# EAGLE board tricolor_rev1 (EAGLE 5.04)
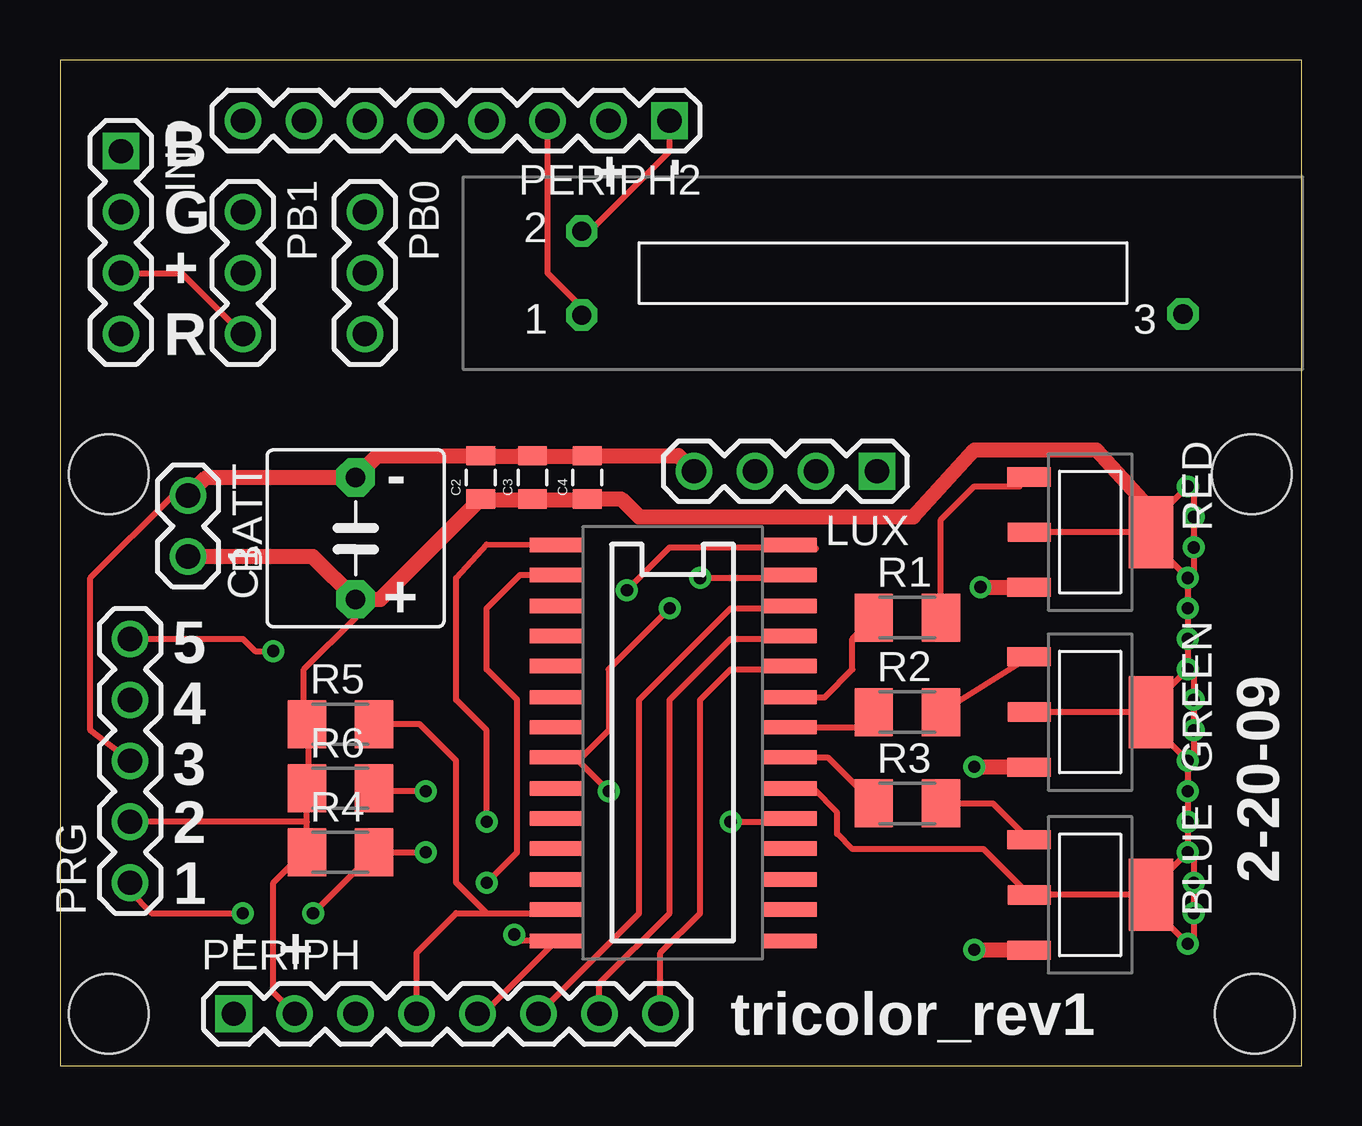
[diagram p0: board, top side]
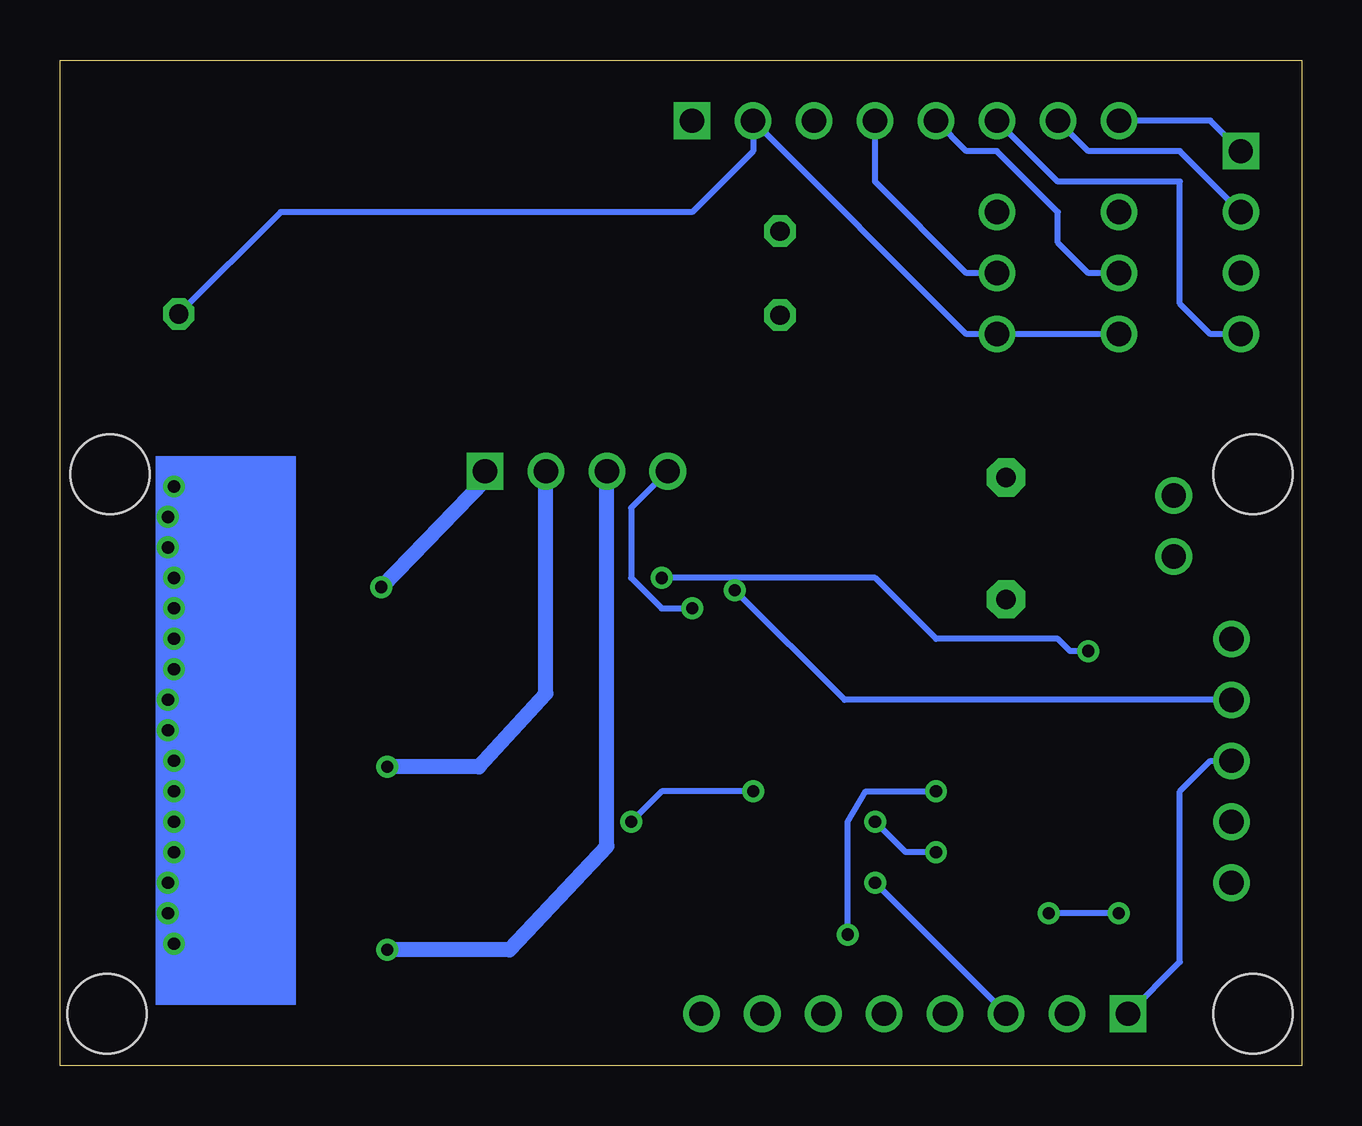
[diagram p1: board, bottom side, seen from below]

Size 51.74 x 41.9 mm. Coordinates in mm from the lower left corner, seen from the top.
Outline: 0,0 51.74,0 51.74,41.9 0,41.9 0,0
Copper layers (1*16): Top 0.035mm / dielectric 1.5mm / Bottom 0.035mm
Design rules "default": minimum track width 10mil, minimum drill 24mil, track to track 8mil, track to pad 8mil, pad to pad 8mil, via to via 8mil, smd to smd 8mil, copper to edge 40mil, drill to drill 8mil, minimum pad ring 10mil, minimum via ring 8mil, stop-mask expansion 4mil, vias tented up to drill 0mil, thermal gap 10mil

## Footprints (pad centres in the part's own frame; a part is rotated, then mirrored left to right if it is on the bottom)
SLIDER-CUSTOM = drill 0.8 octagon: P$1 -12.5,1.7; P$2 12.55,1.75; P$3 12.55,-1.75
1X02 = drill 1.016 round: 1 0,0; 2 2.54,0
SOT223 = smd 0.8 x 1.8: BASE -2.3,-2.55; COLL 0,-2.54; EMIT 2.3,-2.55 | smd 3 x 1.85: HEAT 0,2.54
C5B7.2 = drill 0.813 pad 1.6 octagon: 1 -2.54,0; 2 2.54,0
0805 = smd 0.8 x 1.2: 1 -0.9,0; 2 0.9,0
1X04 = drill 1.016 square: 1 0,0 | drill 1.016 round: 2 2.54,0; 3 5.08,0; 4 7.62,0
SOIC-28 = smd 0.6 x 2.2: 1 -7.6,-4.85; 2 -6.35,-4.85; 3 -5.05,-4.85; 4 -3.8,-4.85; 5 -2.55,-4.85; 6 -1.25,-4.85; 7 0,-4.85; 8 1.25,-4.85; 9 2.55,-4.85; 10 3.8,-4.85; 11 5.05,-4.85; 12 6.35,-4.85; 13 7.6,-4.85; 14 8.9,-4.85; 15 8.9,4.9; 16 7.6,4.9; 17 6.35,4.9; 18 5.05,4.9; 19 3.8,4.9; 20 2.55,4.9; 21 1.25,4.9; 22 0,4.9; 23 -1.25,4.9; 24 -2.55,4.9; 25 -3.8,4.9; 26 -5.05,4.9; 27 -6.35,4.9; 28 -7.6,4.9
1X03 = drill 1.016 round: 1 0,0; 2 2.54,0; 3 5.08,0
1X08 = drill 1.016 square: 1 0,0 | drill 1.016 round: 2 2.54,0; 3 5.08,0; 4 7.62,0; 5 10.16,0; 6 12.7,0; 7 15.24,0; 8 17.78,0
1X05 = drill 1.016 round: 1 0,0; 2 2.54,0; 3 5.08,0; 4 7.62,0; 5 10.16,0
M1206 = smd 1.6 x 2: 1 -1.4,0; 2 1.4,0
STAND-OFF = hole 3.302: 0,0

## Placement (x,y rotation side)
ADJUST  SLIDERV0  [SLIDER-CUSTOM]  34.29,33.02 180 top
BATT  [1X02]  5.33,23.75 270 top
BLUE  FZTA14V1  [SOT223]  42.93,7.11 270 top
C1  100uf  [C5B7.2]  12.32,21.97 90 top
C2  .01uF  [0805]  17.53,24.51 90 top
C3  .1uF  [0805]  19.68,24.51 90 top
C4  .1uF  [0805]  21.97,24.51 90 top
GREEN  FZTA14V1  [SOT223]  42.93,14.73 270 top
IND  [1X04]  2.54,38.1 270 top
LUX  [1X04]  34.04,24.77 180 top
MCU  P18F2221V1  [SOIC-28]  25.53,14.1 270 top
PB0  [1X03]  12.7,35.56 270 top
PB1  [1X03]  7.62,35.56 270 top
PERIPH  [1X08]  7.24,2.16 0 top
PERIPH2  [1X08]  25.4,39.37 180 top
PRG  [1X05]  2.92,7.62 90 top
R1  6.65K  [M1206]  35.31,18.67 0 top
R2  3.3K  [M1206]  35.31,14.73 0 top
R3  3.3K  [M1206]  35.31,10.92 0 top
R4  10K  [M1206]  11.68,8.89 0 top
R5  10K  [M1206]  11.68,14.22 0 top
R6  10K  [M1206]  11.68,11.56 0 top
RED  FZTA14V1  [SOT223]  42.93,22.23 270 top
U$1  [STAND-OFF]  2.03,2.16 0 top
U$2  [STAND-OFF]  2.03,24.64 0 top
U$3  [STAND-OFF]  49.66,24.64 0 top
U$4  [STAND-OFF]  49.78,2.16 0 top

## Library data of the parts
ADJUST BLUE GREEN MCU RED = purduecer
BATT C2-C4 IND LUX PB0 PB1 PERIPH PERIPH2 PRG U$1-U$4 = SparkFun
C1 = capacitor-wima
R1-R6 = resistor

## Nets
BLUE: IND.1 PERIPH2.8
BLUE_IND: MCU.24 PERIPH.8
BLUE_LUX: BLUE.EMIT LUX.3
GND: BATT.1 C1.2 C2.2 C3.2 C4.2 LUX.4 MCU.8 MCU.19 PERIPH.1 PRG.3
GREEN: IND.2 PERIPH2.7
GREEN_IND: MCU.25 PERIPH.7
GREEN_LUX: GREEN.EMIT LUX.2
MCLR: MCU.1 PRG.1 R4.2
N$4: MCU.23 R1.1
N$5: R1.2 RED.BASE
N$6: MCU.22 R2.1
N$7: GREEN.BASE R2.2
N$8: MCU.21 R3.1
N$9: BLUE.BASE R3.2
PB0: MCU.13 PERIPH.4 R5.2
PB1: MCU.14 PERIPH.5 R6.2
PB_0: PB0.2 PERIPH2.4
PB_1: PB1.2 PERIPH2.5
PGC: MCU.27 PRG.5
PGD: MCU.28 PRG.4
POT: MCU.2 PERIPH.3
PWR: ADJUST.P$1 IND.3 PB0.3 PB1.3 PERIPH2.2
RED: IND.4 PERIPH2.6
RED_IND: MCU.26 PERIPH.6
RED_LUX: LUX.1 RED.EMIT
SLIDE: ADJUST.P$2 PERIPH2.3
VCC: BATT.2 BLUE.COLL BLUE.HEAT C1.1 C2.1 C3.1 C4.1 GREEN.COLL GREEN.HEAT MCU.20 PERIPH.2 PRG.2 R4.1 R5.1 R6.1 RED.COLL RED.HEAT
VSS: ADJUST.P$3 PERIPH2.1

## Tracks (layer width: path | path; a pad name or v marks a point on that pad's centre or on a via)
BLUE
  Bottom 0.254: IND.1 3.81,39.37 PERIPH2.8
BLUE_IND
  Top 0.254: PERIPH.8 25.02,4.7 26.67,6.35 26.67,15.24 27.94,16.51 30.29,16.51 MCU.24
BLUE_LUX  (via drill 0.51)
  Top 0.254: 40.23,4.83 BLUE.EMIT
  Top 0.635: v38.1,4.83 40.23,4.83
  Bottom 0.635: LUX.3 28.96,9.14 33.02,4.83 v38.1,4.83
GND  (via drill 0.51)
  Top 0.254: C2.2 18.09,25.4 | 19.1,25.4 C3.2 20.12,25.4 | 21.54,25.4 C4.2 | BATT.1 4.7,23.75 1.27,20.32 1.27,13.97 PRG.3 | 21.44,12.85 MCU.8 | 21.44,12.85 v22.86,11.43 | v27.94,10.16 30.29,10.16 MCU.19 | 21.44,12.85 21.74,12.85 22.86,13.97 22.86,16.51 v25.4,19.05
  Top 0.635: 18.09,25.4 19.1,25.4 | 20.12,25.4 21.54,25.4 | C2.2 13.22,25.41 C1.2 6.1,24.51 BATT.1 | C4.2 25.77,25.41 LUX.4
  Bottom 0.254: PRG.3 3.81,12.7 5.08,11.43 5.08,4.32 PERIPH.1 | v22.86,11.43 26.67,11.43 v27.94,10.16 | v25.4,19.05 26.67,19.05 27.94,20.32 27.94,23.24 LUX.4
GREEN
  Bottom 0.254: IND.2 5.08,38.1 8.89,38.1 PERIPH2.7
GREEN_IND
  Top 0.254: PERIPH.7 22.48,3.43 25.4,6.35 25.4,15.24 27.94,17.78 30.31,17.78 MCU.25
GREEN_LUX  (via drill 0.51)
  Top 0.254: 40.23,12.45 GREEN.EMIT
  Top 0.635: v38.1,12.45 40.23,12.45
  Bottom 0.635: LUX.2 31.5,15.49 34.29,12.45 v38.1,12.45
MCLR  (via drill 0.51)
  Top 0.254: PRG.1 2.92,7.24 3.81,6.35 v7.62,6.35 | v10.54,6.35 R4.2 v15.24,8.89 | 20.57,21.59 MCU.1 17.78,21.72 16.51,20.32 16.51,15.24 17.78,13.97 v17.78,10.16
  Bottom 0.254: v7.62,6.35 v10.54,6.35 | v15.24,8.89 16.51,8.89 v17.78,10.16
N$4
  Top 0.254: MCU.23 31.86,15.35 33.02,16.51 33.02,17.78 R1.1
N$5
  Top 0.254: R1.2 36.71,22.74 38.1,24.13 39.98,24.13 RED.BASE
N$6
  Top 0.254: MCU.22 33.27,14.1 R2.1
N$7
  Top 0.254: R2.2 GREEN.BASE
N$8
  Top 0.254: MCU.21 31.98,12.85 R3.1
N$9
  Top 0.254: R3.2 38.87,10.92 BLUE.BASE
N$17  (via drill 0.51)
  other vias: 46.99,5.08
N$18  (via drill 0.51)
  other vias: 47.24,6.35
N$19  (via drill 0.51)
  other vias: 47.24,7.62
N$20  (via drill 0.51)
  other vias: 46.99,8.89
N$21  (via drill 0.51)
  other vias: 46.99,10.16
N$22  (via drill 0.51)
  other vias: 46.99,11.43
N$23  (via drill 0.51)
  other vias: 46.99,12.7
N$24  (via drill 0.51)
  other vias: 47.24,13.97
N$25  (via drill 0.51)
  other vias: 47.24,15.24
N$26  (via drill 0.51)
  other vias: 46.99,16.51
N$27  (via drill 0.51)
  other vias: 46.99,17.78
N$28  (via drill 0.51)
  other vias: 46.99,19.05
N$29  (via drill 0.51)
  other vias: 46.99,20.32
N$30  (via drill 0.51)
  other vias: 47.24,21.59
N$31  (via drill 0.51)
  other vias: 47.24,22.86
N$32  (via drill 0.51)
  other vias: 46.99,24.13
PB0
  Top 0.254: 17.78,6.35 16.51,6.35 14.86,4.7 PERIPH.4 | 17.78,6.35 20.53,6.35 MCU.13 | R5.2 14.99,14.22 16.51,12.7 16.51,7.62 17.78,6.35
PB1  (via drill 0.51)
  Top 0.254: PERIPH.5 17.64,2.16 MCU.14 19.17,5.2 v18.92,5.46 | v15.24,11.43 13.21,11.43 R6.2
  Bottom 0.254: v18.92,5.46 18.92,10.16 18.16,11.43 v15.24,11.43
PB_0
  Bottom 0.254: PB0.2 13.97,33.02 17.78,36.83 PERIPH2.4
PB_1
  Bottom 0.254: PB1.2 8.89,33.02 10.16,34.29 10.16,35.56 12.7,38.1 13.97,38.1 PERIPH2.5
PGC  (via drill 0.51)
  Top 0.254: PRG.5 7.62,17.78 8.13,17.27 v8.89,17.27 | v26.67,20.32 30.3,20.32 MCU.27
  Bottom 0.254: v8.89,17.27 9.65,17.27 10.16,17.78 15.24,17.78 17.78,20.32 v26.67,20.32
PGD  (via drill 0.51)
  Top 0.254: 31.5,21.54 MCU.28 30.32,21.59 25.4,21.59 v23.62,19.81
  Bottom 0.254: PRG.4 19.05,15.24 v23.62,19.81
POT  (via drill 0.51)
  Top 0.254: v17.78,7.62 19.05,8.89 19.05,15.24 17.78,16.51 17.78,19.05 19.18,20.45 MCU.2 20.55,20.32
  Bottom 0.254: PERIPH.3 v17.78,7.62
PWR
  Top 0.254: IND.3 5.08,33.02 PB1.3
  Bottom 0.254: PB1.3 PB0.3 13.97,30.48 PERIPH2.2 22.86,38.1 25.4,35.56 42.55,35.56 ADJUST.P$1
RED
  Bottom 0.254: IND.4 3.81,30.48 5.08,31.75 5.08,36.83 10.16,36.83 PERIPH2.6
RED_IND
  Top 0.254: PERIPH.6 24.13,6.35 24.13,15.24 27.94,19.05 30.33,19.05 MCU.26
RED_LUX  (via drill 0.51)
  Top 0.254: 40.23,19.94 RED.EMIT
  Top 0.635: v38.35,19.94 40.23,19.94
  Bottom 0.635: LUX.1 34.04,24.38 v38.35,19.94
SLIDE
  Top 0.254: ADJUST.P$2 21.74,31.6 20.32,33.02 PERIPH2.3
VCC
  Top 0.254: C2.1 18.09,23.57 | 19.1,23.57 C3.1 20.12,23.57 | 21.54,23.57 C4.1 | 10.28,10.16 R4.1 10.16,8.89 8.89,7.62 8.89,3.05 PERIPH.2 | 10.28,10.16 R6.1 10.36,12.39 10.36,13.41 R5.1 10.16,14.35 10.16,16.51 12.32,18.67 C1.1 | 10.28,10.16 PRG.2 | RED.COLL RED.HEAT 45.47,22.61 45.72,22.86 46.99,24.13 47.24,23.88 47.24,20.57 46.99,20.32 | 46.99,20.32 45.72,21.59 | GREEN.HEAT GREEN.COLL | GREEN.HEAT 45.47,14.99 45.72,15.24 | 46.99,20.32 46.99,16.51 | GREEN.HEAT 45.47,14.22 45.72,13.97 | 46.99,12.7 47.24,12.95 47.24,16.26 46.99,16.51 | 46.99,16.51 45.72,15.24 | 45.72,15.24 45.72,13.97 | 45.72,13.97 46.99,12.7 | 46.99,12.7 46.99,8.89 | 46.99,8.89 47.24,8.64 47.24,5.33 46.99,5.08 45.72,6.35 45.72,6.86 BLUE.HEAT | 46.99,8.89 45.21,7.11 BLUE.COLL 38.48,9.02 33.02,9.02 32.38,9.65 32.38,10.54 31.38,11.55 MCU.20
  Top 0.635: 18.09,23.57 19.1,23.57 | 20.12,23.57 21.54,23.57 | BATT.2 10.54,21.21 C1.1 13.35,19.43 C2.1 | C4.1 23.38,23.61 24.13,22.86 35.56,22.86 38.1,25.65 43.18,25.65 45.72,22.86
VSS
  Top 0.254: ADJUST.P$3 22.07,34.77 25.4,38.1 PERIPH2.1
(copper drawn outside any net)
  shapes: Bottom area x1

## Text on the board
tPlace: + | - | B | G | + | R | - | + | 5 | 4 | 3 | 2 | 2-20-09 | 1 | - | + | tricolor_rev1